# Allegro board gumstix_expansion_v2r10_bottommask.brd
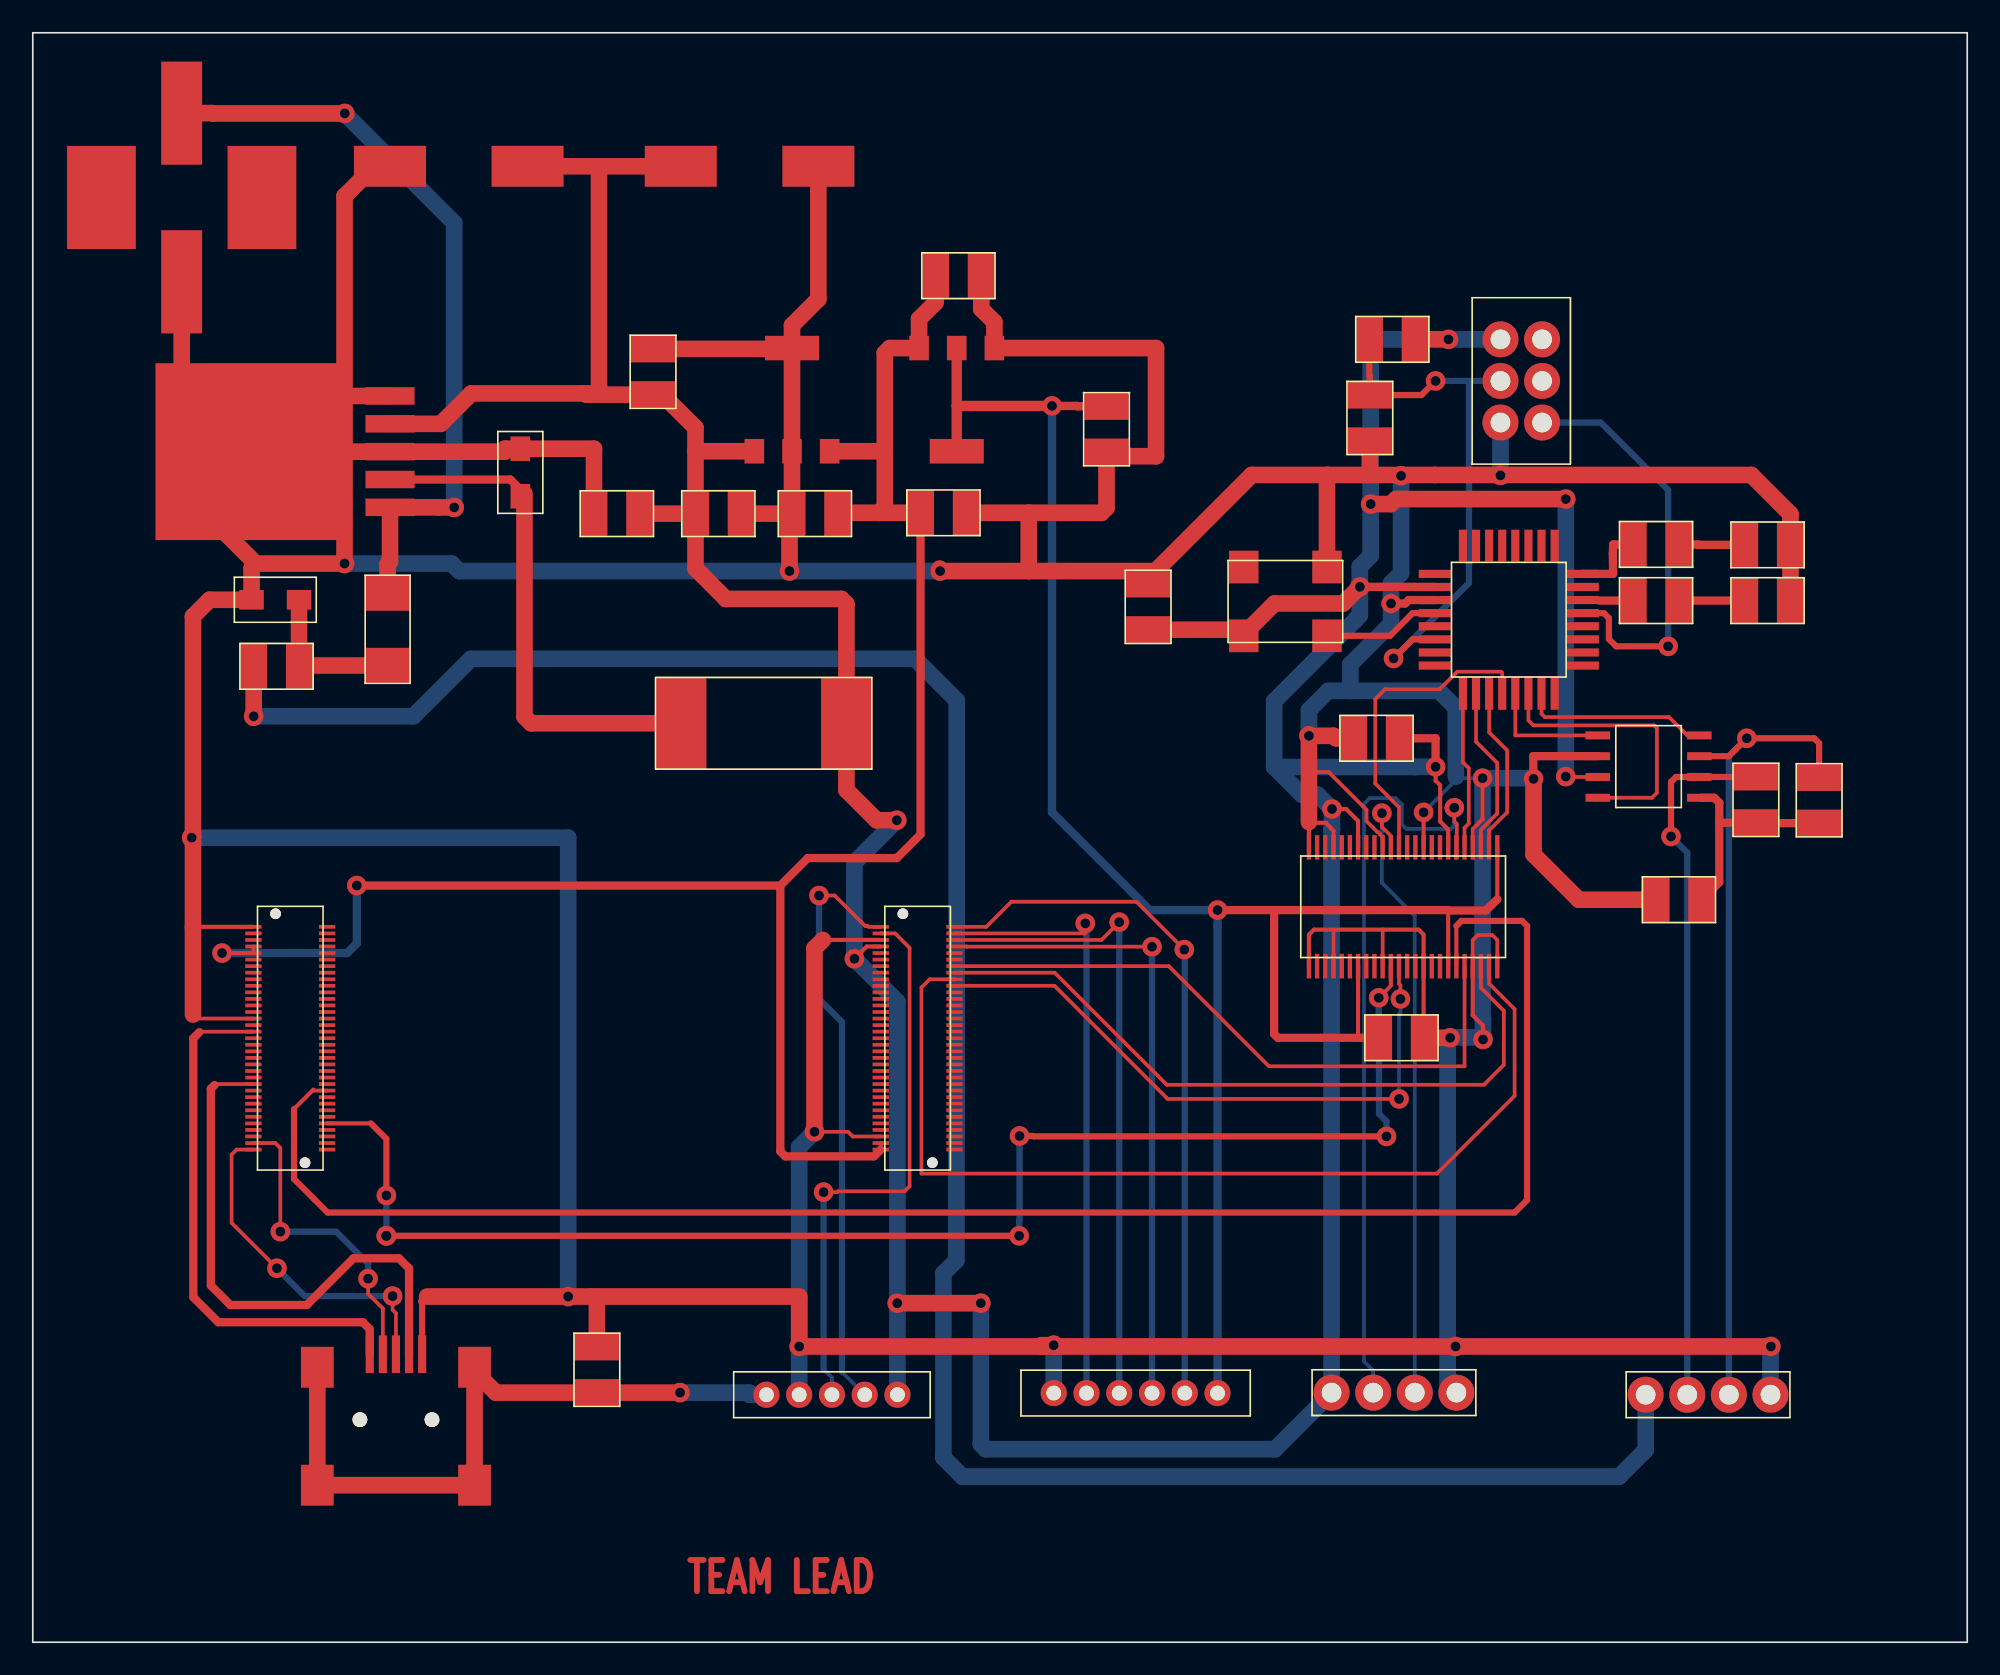
[diagram p0: board, top side]
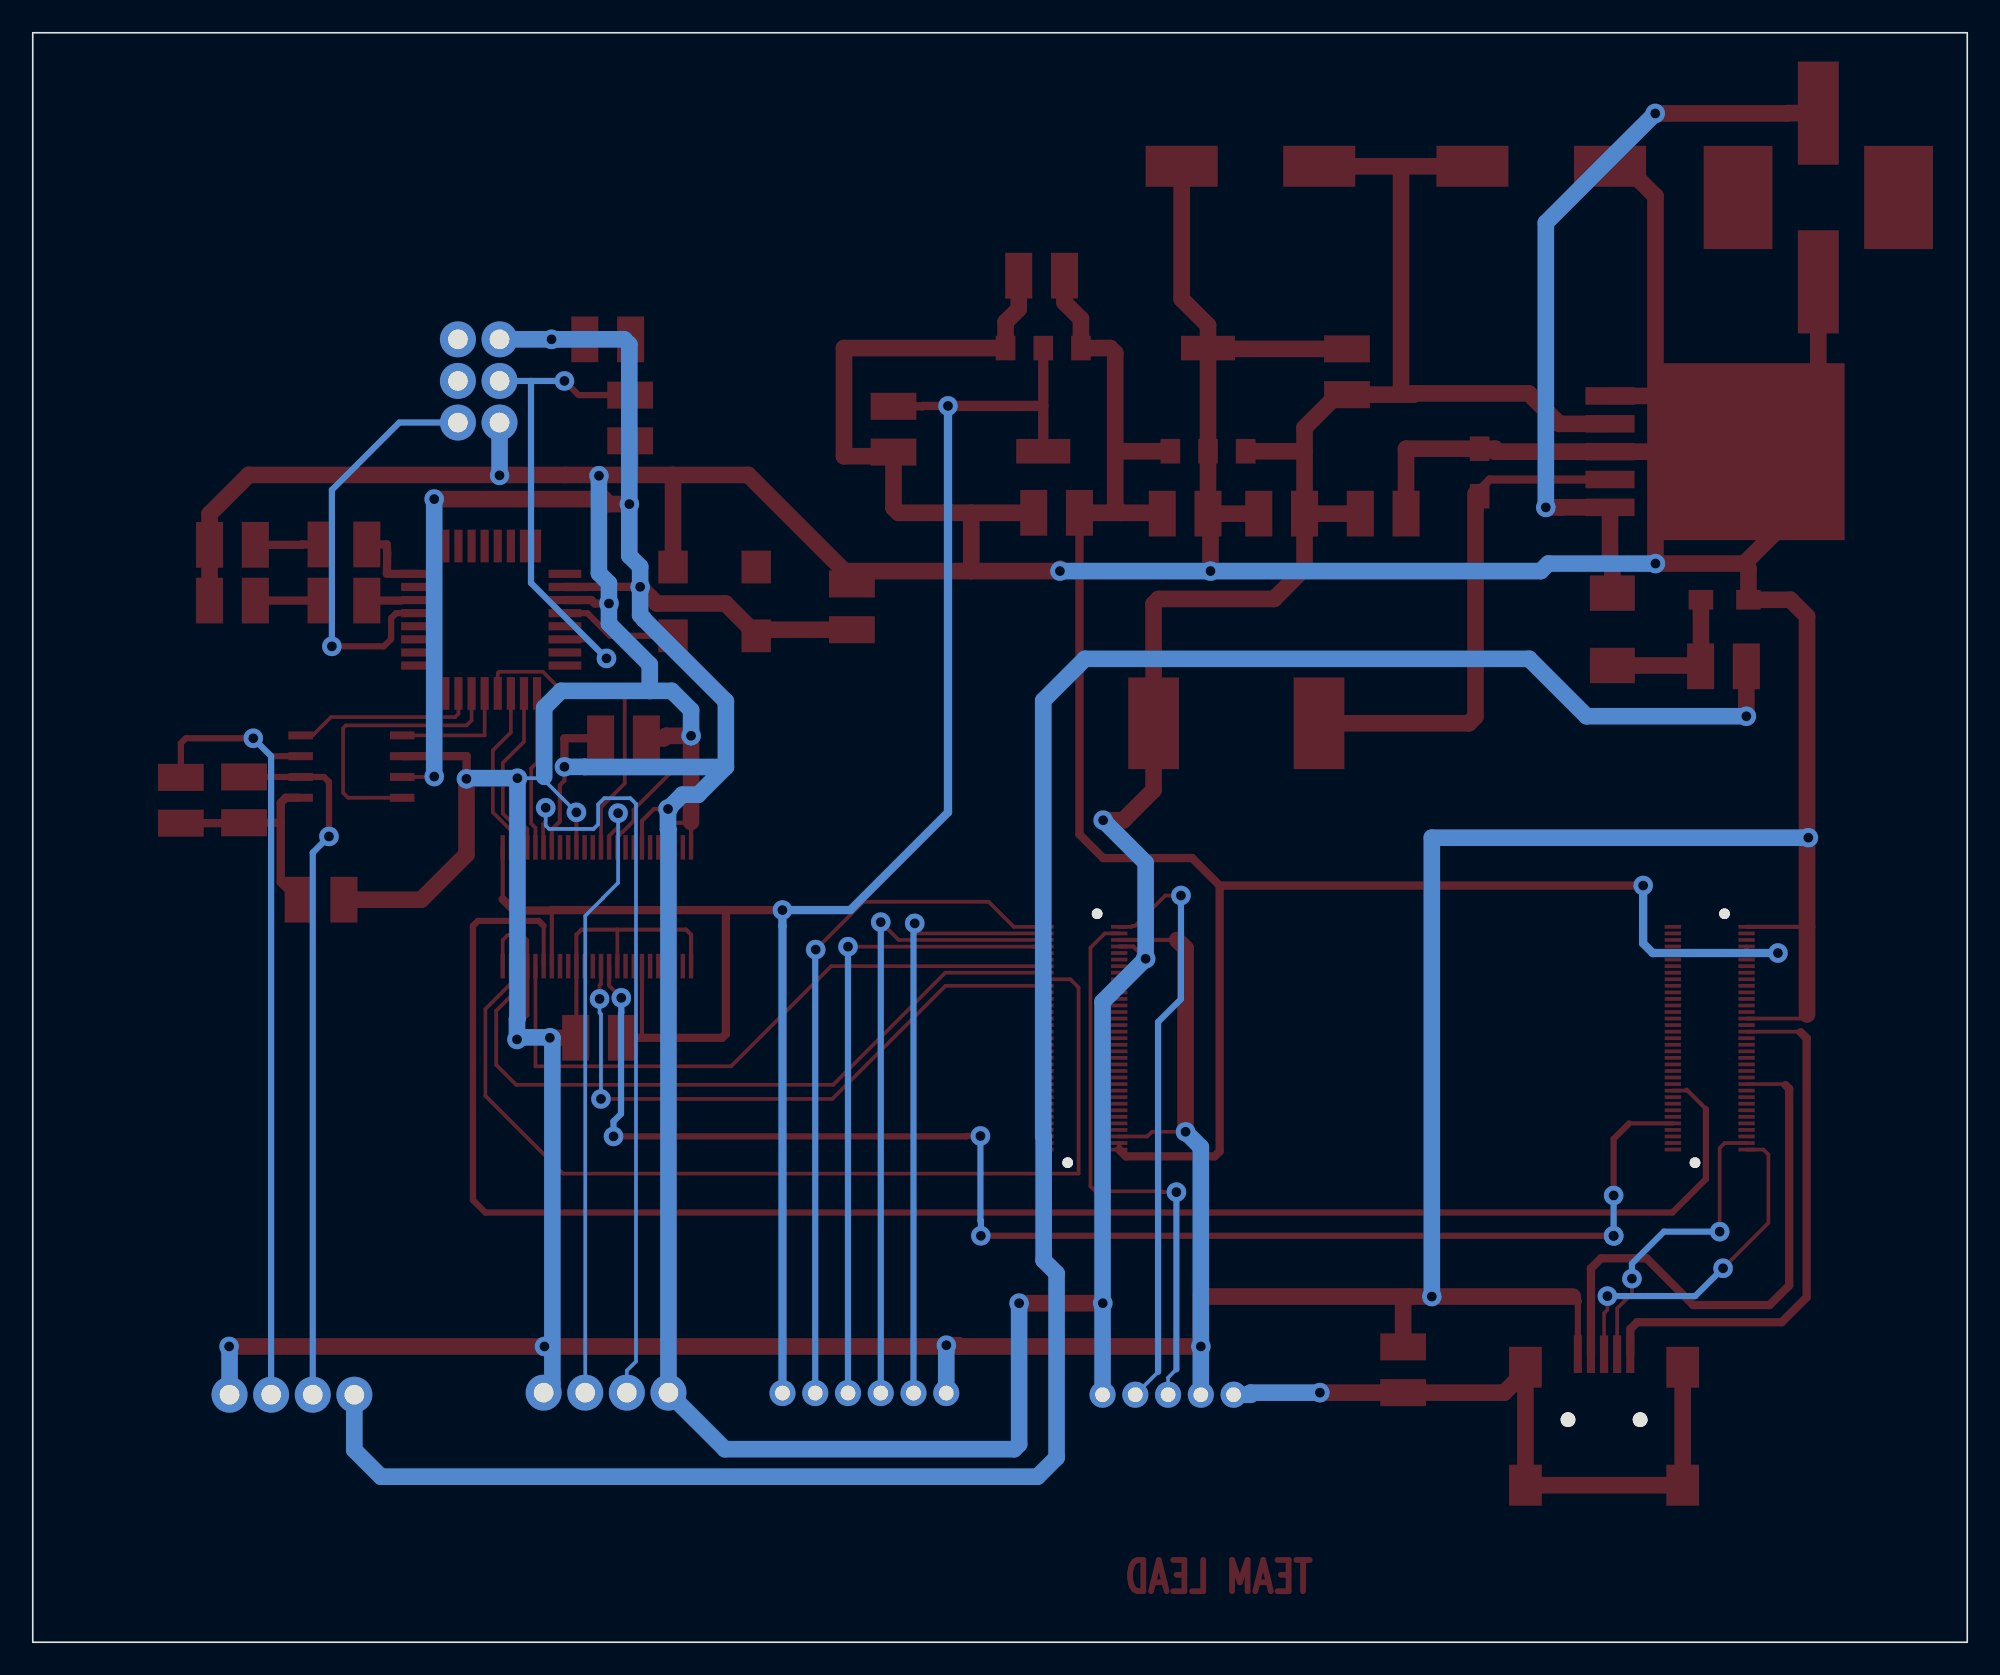
[diagram p1: board, bottom side, seen from below]

Outline 118.11 x 98.27 mm; copper layers: TOP, BOTTOM. Coordinates in mm from the lower left corner of the outline.
Outline path: rectangle 0,0 118.11,98.27

## Placement (name value [footprint] x y rotation side)
C1  1n  [1210]  34.44 16.64 90 top
C9  0.1u  [1210]  82.04 55.19 180 top
C10  0.1u  [1210]  83.57 36.91 0 top
C11  0.1u  [1210]  100.51 45.34 0 top
C12  0.1u  [1210]  81.64 74.75 90 top
C13  220u  [1014]  26.01 90.12 0 top
C14  100u  [1014]  43.76 90.12 180 top
C15  680u  [1213]  9.09 88.21 90 top
C16  100n  [1210]  37.87 77.57 270 top
C17  33u  [1210]  47.75 68.91 180 top
C18  0.47u  [1210]  41.86 68.91 0 top
C19  10u  [1210]  55.6 68.96 0 top
C20  10u  [1210]  65.56 74.07 270 top
C21  100n  [1210]  68.1 63.22 270 top
C22  100n  [1210]  35.66 68.91 0 top
C23  100n  [1210]  56.52 83.44 180 top
D1  -  [DIODE]  21.67 61.85 90 top
D2  DIODE SCHOTTKY  [SOD323F]  14.81 63.65 0 top
D3  DIODE SCHOTTKY  [SOD323F]  29.77 71.42 270 top
D4  F5E1/TO  [1210]  105.92 67.01 180 top
D5  F5E1/TO  [1210]  105.92 63.6 180 top
F1  FUSE  [1210]  14.88 59.59 180 top
J1  GUMSTIX_J4  [GUMSTIX]  54.03 36.88 180 top
J2  GUMSTIX_J1  [GUMSTIX]  15.72 36.88 0 top
J5  CON9  [MUSBA_TSMT]  22.17 13.59 90 top
J7  Background Header  [BACKGROUND_HEADER]  90.88 77.01 0 top
J8  4 HEADER  [HEADER_LINE_4]  102.29 15.11 270 top
J9  CON6  [HEADER_LINE_6]  67.34 15.21 270 top
J10  4 HEADER  [HEADER_LINE_4]  83.11 15.24 90 top
J11  CON5  [HEADER_LINE_5]  48.79 15.11 270 top
L1  33u  [COIL]  44.63 56.11 0 top
R3  60  [1210]  109.07 51.41 90 top
R4  60  [1210]  105.21 51.43 270 top
R5  10k  [1210]  83.01 79.55 0 top
R6  1k  [1210]  99.11 63.6 0 top
R7  1k  [1210]  99.11 67.03 0 top
U1  MC9S08DZ60  [LQFP32]  90.12 62.43 0 top
U2  SN74LVC16T245  [SN74DGG]  83.67 44.91 270 top
U3  TJA1040T  [TJA1040_SO8]  98.65 53.47 0 top
U5  -  [LM2592]  13.49 72.69 0 top
U6  LM3940  [SOT223]  46.36 79.02 0 top
U7  LM1117-1.8  [SOT223]  56.41 72.72 180 top
U8  -  [OSCILLATOR]  76.48 63.55 0 top

## Library data of the parts
C1 C9 C10 C13-C15 C17-C20 = C_elect_0
C11 C12 C16 C21-C23 = C
D1 = DIODE
D2 D3 = DIODE SCHOTTKY
D4 D5 = F5E1/TO_0
F1 = FUSE
J1 = GUMSTIX_J4
J2 = GUMSTIX_J1
J5 = CON9
J7 = CONN MOD 6-6_J
J8 J10 = 4 HEADER
J9 = CON6
J11 = CON5
L1 = L
R3-R7 = R
U1 = MC9S08DZ60
U2 = SN74LVC16T245
U3 = TJA1040T
U5 = LM2592
U6 = LM3940
U7 = LM1117-1.8
U8 = OSCILLATOR

## Footprints (pads in the part's own frame, mm; a bottom-side part is the same pattern mirrored in y, then rotated)
1014
  rect 4.4x2.5 smd: 1(4.2,0) 2(-4.2,0)
1210
  rect 1.651x2.794 smd: 1(-1.397,0) 2(1.397,0)
1213
  rect 6.3x4.2 smd: (0,4.9) (0,-4.9)
  rect 6.3x2.5 smd: 1(5.15,0) 2(-5.15,0)
BACKGROUND_HEADER
  round 2.2 hole 1.2 unplated: (-1.27,2.54) (-1.27,0) (-1.27,-2.54) (1.27,2.54) (1.27,0) (1.27,-2.54)
COIL
  rect 3.1x5.6 smd: 1(-5.05,0) 2(5.05,0)
DIODE
  rect 2.159x2.743 smd: 1(-2.21,0) 2(2.21,0)
GUMSTIX
  round 0.65 hole 0.65 unplated: (-0.9,7.6) (0.9,-7.6)
  rect 1x0.23 smd: 1(2.25,6.8) 2(2.25,6.4) 3(2.25,6) 4(2.25,5.6) 5(2.25,5.2) 6(2.25,4.8) 7(2.25,4.4) 8(2.25,4) 9(2.25,3.6) 10(2.25,3.2) 11(2.25,2.8) 12(2.25,2.4) 13(2.25,2) 14(2.25,1.6) 15(2.25,1.2) 16(2.25,0.8) 17(2.25,0.4) 18(2.25,0) 19(2.25,-0.4) 20(2.25,-0.8) 21(2.25,-1.2) 22(2.25,-1.6) 23(2.25,-2) 24(2.25,-2.4) 25(2.25,-2.8) 26(2.25,-3.2) 27(2.25,-3.6) 28(2.25,-4) 29(2.25,-4.4) 30(2.25,-4.8) 31(2.25,-5.2) 32(2.25,-5.6) 33(2.25,-6) 34(2.25,-6.4) 35(2.25,-6.8) 36(-2.25,-6.8) 37(-2.25,-6.4) 38(-2.25,-6) 39(-2.25,-5.6) 40(-2.25,-5.2) 41(-2.25,-4.8) 42(-2.25,-4.4) 43(-2.25,-4) 44(-2.25,-3.6) 45(-2.25,-3.2) 46(-2.25,-2.8) 47(-2.25,-2.4) 48(-2.25,-2) 49(-2.25,-1.6) 50(-2.25,-1.2) 51(-2.25,-0.8) 52(-2.25,-0.4) 53(-2.25,0) 54(-2.25,0.4) 55(-2.25,0.8) 56(-2.25,1.2) 57(-2.25,1.6) 58(-2.25,2) 59(-2.25,2.4) 60(-2.25,2.8) 61(-2.25,3.2) 62(-2.25,3.6) 63(-2.25,4) 64(-2.25,4.4) 65(-2.25,4.8) 66(-2.25,5.2) 67(-2.25,5.6) 68(-2.25,6) 69(-2.25,6.4) 70(-2.25,6.8)
HEADER_LINE_4
  round 2.2 hole 1.2 unplated: (0,3.81) (0,1.27) (0,-1.27) (0,-3.81)
HEADER_LINE_5
  round 1.6 hole 0.9 unplated: (0,4) (0,2) (0,0) (0,-2) (0,-4)
HEADER_LINE_6
  round 1.6 hole 0.9 unplated: (0,5) (0,3) (0,1) (0,-1) (0,-3) (0,-5)
LM2592
  rect 3x1.07 smd: 1(8.325,-3.4) 2(8.325,-1.7) 3(8.325,0) 4(8.325,1.7) 5(8.325,3.4)
  rect 12x10.8 smd: 6(0,0)
LQFP32
  rect 2x0.5 smd: 1(-4.5,2.8) 2(-4.5,2) 3(-4.5,1.2) 4(-4.5,0.4) 5(-4.5,-0.4) 6(-4.5,-1.2) 7(-4.5,-2) 8(-4.5,-2.8) 17(4.5,-2.8) 18(4.5,-2) 19(4.5,-1.2) 20(4.5,-0.4) 21(4.5,0.4) 22(4.5,1.2) 23(4.5,2) 24(4.5,2.8)
  rect 0.5x2 smd: 9(-2.8,-4.5) 10(-2,-4.5) 11(-1.2,-4.5) 12(-0.4,-4.5) 13(0.4,-4.5) 14(1.2,-4.5) 15(2,-4.5) 16(2.8,-4.5) 25(2.8,4.5) 26(2,4.5) 27(1.2,4.5) 28(0.4,4.5) 29(-0.4,4.5) 30(-1.2,4.5) 31(-2,4.5) 32(-2.8,4.5)
MUSBA_TSMT
  round 0.9 hole 0.9 unplated: (0,2.2) (0,-2.2)
  rect 2.3x0.5 smd: 1(4,1.6) 2(4,0.8) 3(4,0) 4(4,-0.8) 5(4,-1.6)
  rect 2.5x2 smd: 6(-4,4.8) 7(-4,-4.8) 8(3.2,-4.8) 9(3.2,4.8)
OSCILLATOR
  rect 1.8x2 smd: 1(-2.54,2.1) 2(2.54,2.1) 3(2.54,-2.1) 4(-2.54,-2.1)
SN74DGG
  rect 1.5x0.27 smd: 1(-3.625,5.75) 2(-3.625,5.25) 3(-3.625,4.75) 4(-3.625,4.25) 5(-3.625,3.75) 6(-3.625,3.25) 7(-3.625,2.75) 8(-3.625,2.25) 9(-3.625,1.75) 10(-3.625,1.25) 11(-3.625,0.75) 12(-3.625,0.25) 13(-3.625,-0.25) 14(-3.625,-0.75) 15(-3.625,-1.25) 16(-3.625,-1.75) 17(-3.625,-2.25) 18(-3.625,-2.75) 19(-3.625,-3.25) 20(-3.625,-3.75) 21(-3.625,-4.25) 22(-3.625,-4.75) 23(-3.625,-5.25) 24(-3.625,-5.75) 25(3.625,-5.75) 26(3.625,-5.25) 27(3.625,-4.75) 28(3.625,-4.25) 29(3.625,-3.75) 30(3.625,-3.25) 31(3.625,-2.75) 32(3.625,-2.25) 33(3.625,-1.75) 34(3.625,-1.25) 35(3.625,-0.75) 36(3.625,-0.25) 37(3.625,0.25) 38(3.625,0.75) 39(3.625,1.25) 40(3.625,1.75) 41(3.625,2.25) 42(3.625,2.75) 43(3.625,3.25) 44(3.625,3.75) 45(3.625,4.25) 46(3.625,4.75) 47(3.625,5.25) 48(3.625,5.75)
SOD323F
  rect 1.5x1.2 smd: 1(-1.45,0) 2(1.45,0)
SOT223
  rect 1.2x1.5 smd: 1(-2.3,-6.3) 2(0,-6.3) 3(2.3,-6.3)
  rect 3.3x1.5 smd: 4(0,0)
TJA1040_SO8
  rect 1.5x0.49 smd: 1(-3.1,1.905) 2(-3.1,0.635) 3(-3.1,-0.635) 4(-3.1,-1.905) 5(3.1,-1.905) 6(3.1,-0.635) 7(3.1,0.635) 8(3.1,1.905)

## Nets
1.8V: C10.1(+) C20.1(+) U2.1(1DIR) U2.31(VCCA#31) U2.42(VCCA#42) U7.2(OUT) U7.4(VOUT)
3.3V: C17.1(+) C19.1(+) C23.2 J1.1(VSYSTEM#1) J1.2(VSYSTEM#2) J2.66(VSYSTEM#66) J2.67(VSYSTEM#67) U6.3(OUT) U7.3(IN)
5.0V: C9.1(+) C13.1(+) C14.1(+) C16.2 C18.1(+) C21.2 C22.2 J1.32(USBH_VBUS) L1.2 R5.2 U1.2(VDD) U2.7(VCCB#7) U2.18(VCCB#18) U3.3(VCC) U5.4(FB) U6.1(IN) U8.4(VS)
12V: F1.2
GND: C1.2(-) C9.2(-) C10.2(-) C11.1 C12.1 C13.2(-) C14.2(-) C15.2(-) C16.1 C17.2(-) C18.2(-) C19.2(-) C20.2(-) C21.1 C22.1 C23.1 D2.1(ANODE) D3.1(ANODE) D4.1(CATHODE) D5.1(CATHODE) J1.3(GND#3) J1.33(GND#33) J2.56(GND#56) J2.70(GND#70) J5.5 U1.3(VSS) U2.4(GND#4) U2.10(GND#10) U2.15(GND#15) U2.21(GND#21) U2.24(2DIR) U2.25(2OEN) U2.28(GND#28) U2.34(GND#34) U2.39(GND#39) U2.45(GND#45) U2.48(1OEN) U3.2(GND) U5.3(GND2) U5.5(EN) U5.6(GND1) U6.2(GND1) U6.4(GND2) U7.1(GND) U8.2(GND)
BKGD: U1.21(BKGD/MS)
CANH: R3.2 U3.7(CANH)
CANL: R4.1 U3.6(CANL)
COMMON_SHIELD: C1.1(+) J5.6 J5.7 J5.8 J5.9
GPIO19: J1.36(GPIO19_MMC3_D1)
GPIO20: J1.39(GPIO20_MMC3_D2)
GPIO22: J1.37(GPIO22_MMC3_DAT6)
GPIO23: J1.38(GPIO23_MMC3_DAT5)
GPIO165_IR_RXD3_1.8V: J2.31(GPIO165_IR_RXD3) U2.35(2A2)
GPIO165_IR_RXD3_5V: U2.14(2B2)
GPIO166_IR_TXD3_1.8V: J2.26(GPIO166_IR_TXD3) U2.43(1A4)
GPIO166_IR_TXD3_5V: U2.6(1B4)
RESET: C12.2 R5.1 U1.6(RESETN)
RXCAN: U1.14(PTE7/RXD2/RXCAN) U3.4(RXD)
SPI_CLOCK_1.8V: J1.43(GPIO171_SPI1_CLK) U2.46(1A2)
SPI_CLOCK_5V: U1.10(PTE3/SPSCK) U2.3(1B2)
SPI_CS_1.8V: J1.42(GPIO175_SPI1_CS1) U2.44(1A3)
SPI_CS_5V: U1.9(PTE2/SSN) U2.5(1B3)
SPI_INTERRUPT_5V: U1.7(PTE0/TXD1)
SPI_MISO_1.8V: J1.45(GPIO173_SPI1_MISO) U2.36(2A1)
SPI_MISO_5V: U1.12(PTE5/SDA/MISO) U2.13(2B1)
SPI_MOSI_1.8V: J1.44(GPIO172_SPI1_MOSI) U2.47(1A1)
SPI_MOSI_5V: U1.11(PTE4/SCL/MOSI) U2.2(1B1)
STB: U1.15(PTD0/PID0/TPM2CH0) U3.8(STB)
TXCAN: U1.13(PTE6/TXD2/TXCAN) U3.1(TXD)
USB_OTG_DM: J2.37(USBOTG_DM) J5.2
USB_OTG_DP: J2.36(USBOTG_DP) J5.3
USB_OTG_ID: J2.46(USBOTG_ID) J5.4
USB_OTG_VBUS: J2.54(USBOTG_VBUS) J5.1
USBH_DM: J1.35(USBH_DM)
USBH_DP: J1.34(USBH_DP)
N56753: C11.2 R3.1 R4.2 U3.5(SPLIT)
N57412: U1.4(PTG0/EXTAL) U8.3(OUT)
N58739: C15.1(+) D1.2(K) U5.1(IN)
N58762: D1.1(A) D2.2(CATHODE) F1.1
N58835: D3.2(CATHODE) L1.1 U5.2(OUT)
N63291: R6.1 U1.22(PTB0/PIB0/ADP8)
N63295: R7.1 U1.24(PTB1/PIB1/ADP9)
N63299: D4.2(ANODE) R7.2
N63350: D5.2(ANODE) R6.2

Pads without a net: J1 4 5 6 7 8 9 10 11 12 13 14 15 16 17 18 19 20 21 22 23 24 25 26 27 28 29 30 31 40 41 46 47 48 49 50 51 52 53 54 55 56 57 58 59 60 61 62 63 64 65 66 67 68 69 70; J2 1 2 3 4 5 6 7 8 9 10 11 12 13 14 15 16 17 18 19 20 21 22 23 24 25 27 28 29 30 32 33 34 35 38 39 40 41 42 43 44 45 47 48 49 50 51 52 53 55 57 58 59 60 61 62 63 64 65 68 69; U1 1 5 8 16 17 18 19 20 23 25 26 27 28 29 30 31 32; U2 8 9 11 12 16 17 19 20 22 23 26 27 29 30 32 33 37 38 40 41; U8 1

## Via types
v1: diameter 1.2, hole 0.6, TOP to BOTTOM, 64 vias

## Routing (per net, layer and track width the routed paths; a pad name or vN(x,y) marks a point on that pad's centre or on a via; arc(x,y) is an arc through that point)
1.8V: length 124.8
  TOP w0.254: U2.1 89.42,45.36 ; 86.42,44.68 U2.42 ; 80.92,36.91 U2.31
  TOP w0.508: C20.1 63.78,75.46 63.75,75.49 v1(62.23,75.49) ; 75.79,44.7 75.79,37.13 76.02,36.91 C10.1 ; 75.79,44.7 v1(72.34,44.7) ; 75.79,44.7 86.39,44.7 86.42,44.68 88.73,44.68 89.42,45.36
  TOP w0.635: 56.41,75.49 v1(62.23,75.49) ; 56.41,75.49 U7.2 ; 56.41,75.49 U7.4 56.41,72.64
  BOTTOM w0.508: v1(62.23,75.49) 62.23,50.67 68.2,44.7 v1(72.34,44.7) 72.34,43.72 72.34,43.72 72.34,15.21
3.3V: length 118.2
  TOP w0.254: J2.67 J2.66 v1(11.56,42.08) ; J1.2 J1.1
  TOP w0.508: 45.64,46.2 v1(19.79,46.2) ; 45.64,46.2 45.64,29.97 45.95,29.67 51.36,29.67 J1.1 ; 45.64,46.2 47.32,47.88 52.76,47.88 54.2,49.33 54.2,68.2 54.15,68.25 54.15,68.91 C19.1 ; 49.2,68.96 C17.1
  TOP w1.016: 52.02,72.72 52.02,78.72 52.32,79.02 U7.3 54.11,80.8 55.12,81.8 C23.2 ; 52.02,72.72 U6.3 ; 52.02,72.72 52.02,69.32 51.66,68.96 ; 51.66,68.96 C19.1 ; 51.66,68.96 49.2,68.96
  BOTTOM w0.508: v1(11.56,42.08) 19.2,42.08 19.79,42.67 v1(19.79,46.2)
5.0V: length 313
  TOP w0.229: 73.94,61.82 U8.4 ; v1(93.6,52.86) 93.62,52.83 U3.3
  TOP w0.254: 86.12,64.43 U1.2 ; v1(85.65,53.45) 85.65,52.61 85.93,52.33 85.93,50.11 86.4,49.64 86.4,49.56 86.42,49.54 U2.7 ; v1(50.16,41.73) 50.91,42.48 J1.32 ; v1(79.32,50.88) 80.19,50.88 80.92,50.15 U2.18 ; 84.36,64.44 84.37,64.43
  TOP w0.508: 85.65,53.48 85.65,55.19 C9.1 ; v1(81.03,64.44) 84.36,64.44 ; 84.37,64.43 U1.2
  TOP w1.016: v1(81.03,64.44) 80.01,63.42 75.81,63.42 73.94,61.55 ; 40.46,72.72 C18.1 ; 40.46,72.72 40.46,74.16 38.44,76.17 C16.2 33.81,76.17 33.73,76.25 ; 40.46,72.72 U6.1 ; C18.1 40.46,65.56 42.32,63.7 49.37,63.7 49.68,63.4 L1.2 49.68,52.03 51.52,50.19 v1(52.76,50.19) ; C18.1 C22.2 ; 33.73,76.25 34.57,76.25 34.57,90.12 ; 33.73,76.25 26.77,76.25 24.92,74.39 U5.4 ; 52.92,15.24 52.79,15.11 ; 85.65,53.48 v1(85.65,53.45) ; C21.2 73.94,61.82 ; v1(93.6,69.8) 83.23,69.8 82.92,69.49 v1(81.69,69.49) ; v1(57.89,20.7) v1(52.78,20.7) ; C13.1 34.57,90.12 ; 34.57,90.12 C14.1 ; R5.2 v1(86.44,79.55)
  BOTTOM w1.016: 75.79,53.44 77.49,51.75 78.45,51.75 v1(79.32,50.88) 79.32,49.64 79.3,49.62 79.3,15.24 75.84,11.79 58.19,11.79 57.89,12.09 v1(57.89,20.7) ; 75.79,53.44 75.79,57.45 80.81,62.47 80.81,62.5 81.03,62.71 v1(81.03,64.44) 81.03,65.67 81.69,66.34 v1(81.69,69.49) 81.69,79.25 81.99,79.55 v1(86.44,79.55) 89.61,79.55 ; 75.79,53.44 84.4,53.44 84.41,53.45 v1(85.65,53.45) ; v1(52.76,50.19) 50.16,47.6 v1(50.16,41.73) 52.79,39.1 52.79,20.7 ; v1(52.78,20.7) 52.79,20.7 ; 52.79,20.7 52.79,15.11 ; v1(93.6,69.8) v1(93.6,52.86)
12V: length 142.5
  TOP w1.016: F1.2 v1(13.49,56.54)
  BOTTOM w1.016: 98.48,15.11 98.48,11.73 96.85,10.11 56.76,10.11 55.6,11.27 55.6,22.53 56.39,23.32 56.39,30.86 56.41,30.89 56.41,57.5 53.87,60.05 26.75,60.05 23.24,56.54 v1(13.49,56.54)
GND: length 648.3
  TOP w0.229: v1(47.73,31.17) 49.78,31.17 50.06,30.88 J1.3 ; 68.55,65.41 68.55,64.62 C21.1 ; U2.48 89.42,42.88 89.11,43.18 88.22,43.18 87.92,42.88 U2.45 ; 88.22,49.96 87.92,49.66 U2.4 ; 9.78,38.33 9.78,38.08 J2.56 ; 77.92,53.65 78.43,53.14 79.12,53.14 81.43,50.82 81.43,50.13 82.09,49.47 82.13,49.47 82.24,49.36 82.24,49.32 82.42,49.15 U2.15 ; 86.12,63.63 U1.3 ; 13.66,65.81 13.66,65.86 ; 55.52,65.41 v1(55.4,65.41) ; U2.34 82.42,43.51 ; 85.6,71.27 85.55,71.22 v1(83.54,71.22) ; v1(91.63,52.72) 91.62,52.72
  TOP w0.254: 79.42,43.51 U2.28 ; 79.42,43.51 78.22,43.51 77.92,43.21 U2.25 ; 79.42,43.51 84.61,43.51 84.92,43.21 U2.39 84.92,36.91 C10.2 ; 9.78,43.68 J2.70 ; v1(88.52,52.76) 88.52,50.26 88.22,49.96 ; v1(88.54,36.8) 88.54,37.66 87.92,38.29 U2.45 ; 77.92,50.08 77.92,50.03 ; 77.92,50.03 U2.24 ; 77.92,50.03 78.95,50.03 79.26,49.73 79.26,49.7 79.42,49.54 U2.21 ; 48.24,42.88 J1.33 ; U2.10 v1(84.92,50.67)
  TOP w0.381: 23.77,20.8 J5.5
  TOP w0.508: 65.56,72.42 C20.2 ; 91.62,52.72 91.62,54.1 U3.2 ; v1(82.93,63.42) 83.79,63.42 84,63.63 U1.3 ; 24.08,21.11 23.77,20.8
  TOP w1.016: 81.64,71.27 89.64,71.27 ; 81.64,71.27 C12.1 ; 81.64,71.27 79.02,71.27 ; v1(47.73,31.17) 47.73,42.37 48.24,42.88 ; v1(91.63,52.72) 91.63,48.1 94.39,45.34 C11.1 ; v1(62.33,18.14) 61.59,18.14 61.59,18.06 ; 61.59,18.06 v1(86.87,18.06) v1(106.12,18.06) ; 61.59,18.06 v1(46.79,18.06) 46.79,21.11 34.44,21.11 34.44,20.8 ; C14.2 47.96,82.01 46.36,80.4 U6.4 ; 89.64,71.27 104.93,71.27 107.31,68.88 D4.1 D5.1 ; 89.64,71.27 v1(89.61,71.25) ; 13.66,65.81 9.09,70.38 C15.2 ; 34.44,20.8 C1.2 ; 34.44,20.8 34.14,21.11 v1(32.69,21.11) 24.08,21.11 ; C23.1 57.91,81.41 58.71,80.61 U7.1 68.58,79.02 68.58,72.42 65.56,72.42 65.56,69.27 65.25,68.96 60.81,68.96 ; 19.04,72.69 v1(19.04,65.86) 13.66,65.86 13.36,65.56 D2.1 10.8,63.65 9.78,62.64 9.78,49.2 ; 19.04,72.69 19.04,76.09 ; 19.04,72.69 U5.6 ; 19.04,72.69 U5.3 28.83,72.69 28.83,72.87 D3.1 34.26,72.87 C22.1 ; v1(46.2,65.41) 46.2,68.91 ; 46.2,68.91 C17.2 U6.2 U6.4 ; 46.2,68.91 C18.2 ; 60.81,68.96 60.81,65.41 ; 60.81,68.96 C19.2 ; 60.81,65.41 68.55,65.41 74.42,71.27 79.02,71.27 ; 60.81,65.41 55.52,65.41 55.37,65.56 ; C16.1 46.3,78.97 U6.4 ; v1(86.54,36.91) C10.2 ; C13.2 20.86,90.12 19.04,88.29 19.04,76.09 ; 79.02,71.27 U8.2 ; 9.78,38.33 9.78,49.2 ; 19.04,76.09 U5.5 ; 9.78,49.2 v1(9.7,49.12) ; 77.92,50.08 v1(77.92,55.35) 79.43,55.35 79.58,55.19 C9.2
  BOTTOM w0.229: 86.97,52.76 86.97,52.73 v1(84.92,50.67) ; 86.97,52.76 v1(88.52,52.76) ; 86.97,52.76 86.88,52.84 ; 91.59,52.76 v1(91.63,52.72)
  BOTTOM w1.016: 80.44,58.09 79.1,58.09 77.92,56.91 v1(77.92,55.35) ; 80.44,58.09 85.86,58.09 86.88,57.06 86.88,52.84 ; 80.44,58.09 80.44,59.7 82.93,62.19 v1(82.93,63.42) 82.93,64.66 83.54,65.27 v1(83.54,71.22) ; v1(19.04,65.86) 25.58,65.86 26.04,65.41 v1(46.2,65.41) v1(55.4,65.41) ; 91.59,52.76 v1(88.52,52.76) 88.52,38.06 88.54,38.04 v1(88.54,36.8) 88.42,36.93 86.41,36.93 86.39,36.91 ; v1(106.12,18.06) 106.1,18.06 106.1,15.11 ; 86.39,36.91 86.39,15.77 86.92,15.24 ; 86.39,36.91 v1(86.54,36.91) ; v1(9.7,49.12) 32.69,49.12 v1(32.69,21.11) ; 46.79,15.11 v1(46.79,18.06) 46.79,30.23 v1(47.73,31.17) ; v1(62.33,18.14) 62.34,18.14 62.34,15.21 ; 89.61,74.47 v1(89.61,71.25)
BKGD: length 26.3
  TOP w0.381: 94.12,62.83 U1.21 95.93,62.83 96.23,62.53 96.23,61.25 96.67,60.81 v1(99.85,60.81)
  BOTTOM w0.381: 92.15,74.47 95.73,74.47 99.85,70.36 v1(99.85,60.81)
CANH: length 50.5
  TOP w0.229: U3.7 101.87,54.1
  TOP w0.381: R3.2 109.07,54.89 108.76,55.19 v1(104.65,55.19) 103.56,54.1 101.87,54.1
  BOTTOM w0.381: 103.56,15.11 103.56,54.1 v1(104.65,55.19)
CANL: length 43.1
  TOP w0.381: R4.1 U3.6 100.33,52.83 100.03,52.53 v1(100.03,49.2)
  BOTTOM w0.381: 101.02,15.11 101.02,48.21 v1(100.03,49.2)
COMMON_SHIELD: length 42.5
  TOP w1.016: 26.97,16.54 28.27,15.24 C1.1 v1(39.52,15.24) ; 26.97,16.54 J5.8 ; 26.97,16.54 J5.7 J5.6 J5.9
  BOTTOM w1.016: 44.79,15.11 43.75,15.11 43.75,15.24 v1(39.52,15.24)
GPIO19: length 43
  TOP w0.229: J1.36 58.22,43.68 59.75,45.21 67.39,45.21 v1(70.31,42.29)
  BOTTOM w0.229: 70.34,42.29 v1(70.31,42.29)
  BOTTOM w0.381: 70.34,15.21 70.34,42.29
GPIO20: length 39.3
  TOP w0.229: v1(68.34,42.47) 57.03,42.47 57.02,42.48 J1.39
  BOTTOM w0.381: 68.34,15.21 v1(68.34,42.47)
GPIO22: length 37.3
  TOP w0.229: v1(64.26,43.89) 64.26,43.28 J1.37
  BOTTOM w0.229: v1(64.26,43.89) 64.26,43.35 64.34,43.35
  BOTTOM w0.381: 64.34,15.21 64.34,43.35
GPIO23: length 39.3
  TOP w0.229: J1.38 65.25,42.88 v1(66.34,43.97)
  BOTTOM w0.381: 66.34,15.21 v1(66.34,43.97)
GPIO165_IR_RXD3_1.8V: length 88
  TOP w0.229: v1(82.18,39.35) 82.92,40.09 82.92,40.17
  TOP w0.254: J2.31 20.64,31.68 ; 82.92,40.17 U2.35
  TOP w0.381: v1(21.59,27.28) 21.59,30.73 20.64,31.68 ; v1(82.65,30.89) 61.12,30.89 61.09,30.91 v1(60.25,30.91) ; v1(60.22,24.82) v1(21.59,24.82)
  BOTTOM w0.381: v1(60.22,24.82) 60.22,25.73 60.25,25.76 v1(60.25,30.91) ; v1(21.59,24.82) v1(21.59,27.28) ; v1(82.18,39.35) 82.18,38.43 82.19,38.41 82.19,32.26 82.65,31.8 v1(82.65,30.89)
GPIO165_IR_RXD3_5V: length 38.5
  TOP w0.229: U2.14 82.92,49.24 82.37,49.78 v1(82.37,50.62)
  BOTTOM w0.229: v1(82.37,50.62) 82.37,46.37 83.3,45.44 83.3,45.42 84.38,44.35 84.38,15.24
GPIO166_IR_TXD3_1.8V: length 107.1
  TOP w0.229: J2.26 17.13,33.68 17.13,33.74
  TOP w0.254: 15.95,32.56 17.13,33.74 ; U2.43 86.92,43.74
  TOP w0.381: 15.95,32.56 15.95,28.28 17.17,27.06 18,26.24 90.47,26.24 91.24,27 91.24,43.74 90.93,44.04 87.22,44.04 86.92,43.74
GPIO166_IR_TXD3_5V: length 48.2
  TOP w0.229: U2.6 86.92,47.92 86.94,47.94 86.94,49.96 86.79,50.11 v1(86.79,50.95)
  BOTTOM w0.229: v1(86.79,50.95) 86.79,49.86 86.59,49.66 83.87,49.66 83.59,49.94 83.59,51.16 83.21,51.54 81.62,51.54 81.28,51.19 81.28,17.14 81.84,16.58 81.84,15.24
RESET: length 34.1
  TOP w0.381: v1(83.08,60.07) 84.25,61.23 U1.6 86.12,61.23 ; 81.61,79.55 81.61,77.32 81.64,77.29 C12.2 84.79,76.15 v1(85.65,77.01)
  BOTTOM w0.381: v1(85.65,77.01) 87.69,77.01 ; 87.69,77.01 87.69,64.68 v1(83.08,60.07) ; 87.69,77.01 89.61,77.01
RXCAN: length 17.9
  TOP w0.229: 91.32,58.43 U1.14 91.32,56.29 91.62,55.98 98.99,55.98 99.16,55.81 99.16,51.87 98.86,51.56 U3.4
SPI_CLOCK_1.8V: length 43.5
  TOP w0.229: J1.43 62.4,40.88 69.24,34.04 88.6,34.04 89.81,35.26 89.81,38.56 88.42,39.95 U2.46
SPI_CLOCK_5V: length 10.8
  TOP w0.229: 88.12,58.43 U1.10 88.12,54.98 89.41,53.7 89.41,50.6 88.42,49.61 U2.3
SPI_CS_1.8V: length 39.8
  TOP w0.229: J1.42 69.36,41.28 75.47,35.17 87.42,35.17 U2.44
SPI_CS_5V: length 10.2
  TOP w0.229: U2.5 87.42,49.73 87.68,49.99 87.68,53.36 87.32,53.72 U1.9 87.32,58.43
SPI_MISO_1.8V: length 38.2
  TOP w0.229: v1(83.5,39.28) 83.5,40.12 83.42,40.21 U2.36 ; J1.45 62.38,40.08 69.29,33.17 v1(83.42,33.17)
  BOTTOM w0.229: v1(83.42,33.17) 83.42,38.35 83.5,38.44 v1(83.5,39.28)
SPI_MISO_5V: length 19.4
  TOP w0.229: U1.12 89.72,59.18 89.64,59.26 86.97,59.26 85.9,58.19 82.58,58.19 81.97,57.58 81.97,52.43 83.42,50.98 U2.13
SPI_MOSI_1.8V: length 60.3
  TOP w0.229: U2.47 88.92,40.22 90.47,38.66 90.47,33.36 85.73,28.61 54.26,28.61 54.26,39.98 54.76,40.48 J1.44
SPI_MOSI_5V: length 10.8
  TOP w0.229: U2.2 88.92,49.57 90.02,50.67 90.02,54.46 88.92,55.56 U1.11 88.92,58.43
STB: length 12
  TOP w0.229: 92.12,58.43 U1.15 92.12,56.69 92.32,56.49 99.9,56.49 101.02,55.37 U3.8 101.87,55.37
TXCAN: length 8.1
  TOP w0.229: 90.52,58.43 U1.13 90.52,55.37 U3.1
USB_OTG_DM: length 18.9
  TOP w0.229: J5.2 21.37,20.38 20.47,21.28 v1(20.47,22.2) ; J2.37 14.81,30.48 15.12,30.18 v1(15.12,25.07)
  BOTTOM w0.381: v1(15.12,25.07) 18.52,25.07 20.47,23.12 v1(20.47,22.2)
USB_OTG_DP: length 20.9
  TOP w0.229: v1(21.97,21.13) 21.97,20.29 22.17,20.09 J5.3 ; J2.36 12.45,30.08 12.14,29.78 12.14,25.6 v1(14.91,22.83)
  BOTTOM w0.381: v1(14.91,22.83) 16.61,21.13 v1(21.97,21.13)
USB_OTG_ID: length 34
  TOP w0.229: J2.46 11.1,34.08 11.1,34.02
  TOP w0.508: 11.1,34.02 10.87,33.79 10.87,21.78 12.07,20.59 16.73,20.59 19.58,23.44 22.36,23.44 22.97,22.83 J5.4
USB_OTG_VBUS: length 32.8
  TOP w0.229: 10.18,37.25 10.18,37.28 J2.54
  TOP w0.508: 10.18,37.25 9.8,36.88 9.8,21.06 11.33,19.54 20.16,19.54 20.57,19.12 J5.1
USBH_DM: length 36.2
  TOP w0.229: J1.35 51.03,43.68 50.98,43.74 50.82,43.74 48.96,45.59 v1(48.01,45.59)
  BOTTOM w0.229: 49.4,16.5 50.79,15.11
  BOTTOM w0.381: v1(48.01,45.59) 48.01,39.27 49.4,37.87 49.4,16.5
USBH_DP: length 34.7
  TOP w0.229: v1(48.29,27.48) 49.13,27.48 49.18,27.54 53.23,27.54 53.53,27.84 53.53,42.4 52.65,43.28 J1.34
  BOTTOM w0.229: 48.29,16.66 48.79,16.15 48.79,15.11
  BOTTOM w0.381: v1(48.29,27.48) 48.29,16.66
N56753: length 13.8
  TOP w0.229: U3.5 101.87,51.56
  TOP w0.508: 102.97,50.04 102.97,46.41 C11.2 ; 102.97,50.04 R4.2 105.23,50.01 R3.1 ; 102.97,50.04 102.97,51.26 102.67,51.56 101.87,51.56
N57412: length 7.7
  TOP w0.229: 86.12,62.83 U1.4
  TOP w0.381: U1.4 84.25,62.83 82.86,61.45 U8.3
N58739: length 46
  TOP w1.016: v1(25.73,69.29) 24.79,69.29 24.79,69.29 U5.1 21.81,65.98 21.67,65.84 D1.2 ; C15.1 10.98,93.36 11,93.34 v1(19.05,93.34)
  BOTTOM w1.016: v1(25.73,69.29) 25.73,86.66 v1(19.05,93.34)
N58762: length 9.6
  TOP w1.016: 16.64,59.59 16.69,59.64 D1.1 ; 16.64,59.59 F1.1 ; 16.64,59.59 16.26,59.97 D2.2
N58835: length 32.2
  TOP w0.508: U5.2 21.81,70.99 29.16,70.99 30.02,70.13 29.87,69.97 D3.2
  TOP w1.016: L1.1 30.43,56.11 30.02,56.52 30.02,70.13
N63291: length 3.6
  TOP w0.229: 95.65,63.6 95.62,63.63 U1.22 94.12,63.63
  TOP w0.508: R6.1 95.65,63.6
N63295: length 5.4
  TOP w0.229: 94.12,65.23 U1.24
  TOP w0.508: R7.1 96.49,67.03 96.47,66.47 96.49,65.23 U1.24
N63299: length 4
  TOP w0.508: R7.2 101.68,67.03 101.68,67.01 D4.2
N63350: length 4
  TOP w0.508: R6.2 D5.2

## Text on the board
TOP: TEAM LEAD
